# EAGLE board Energy_Meter_v1.1 (EAGLE 9.5.1)
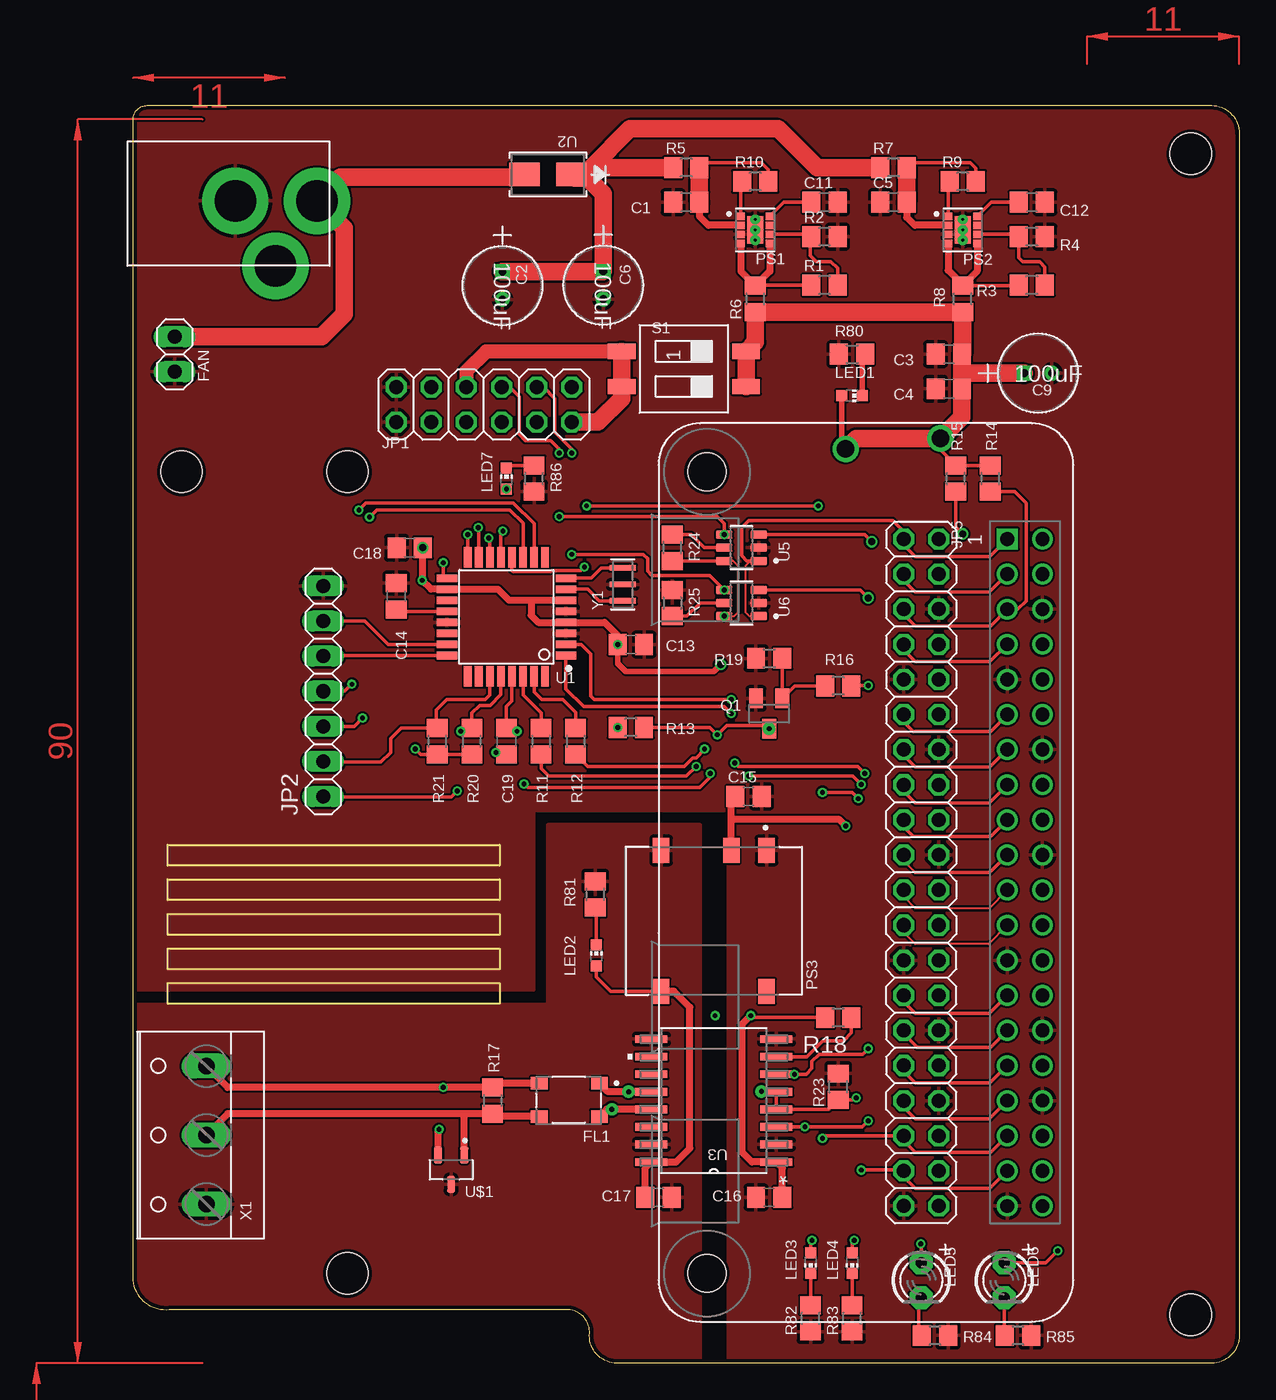
[diagram p0: board, top side]
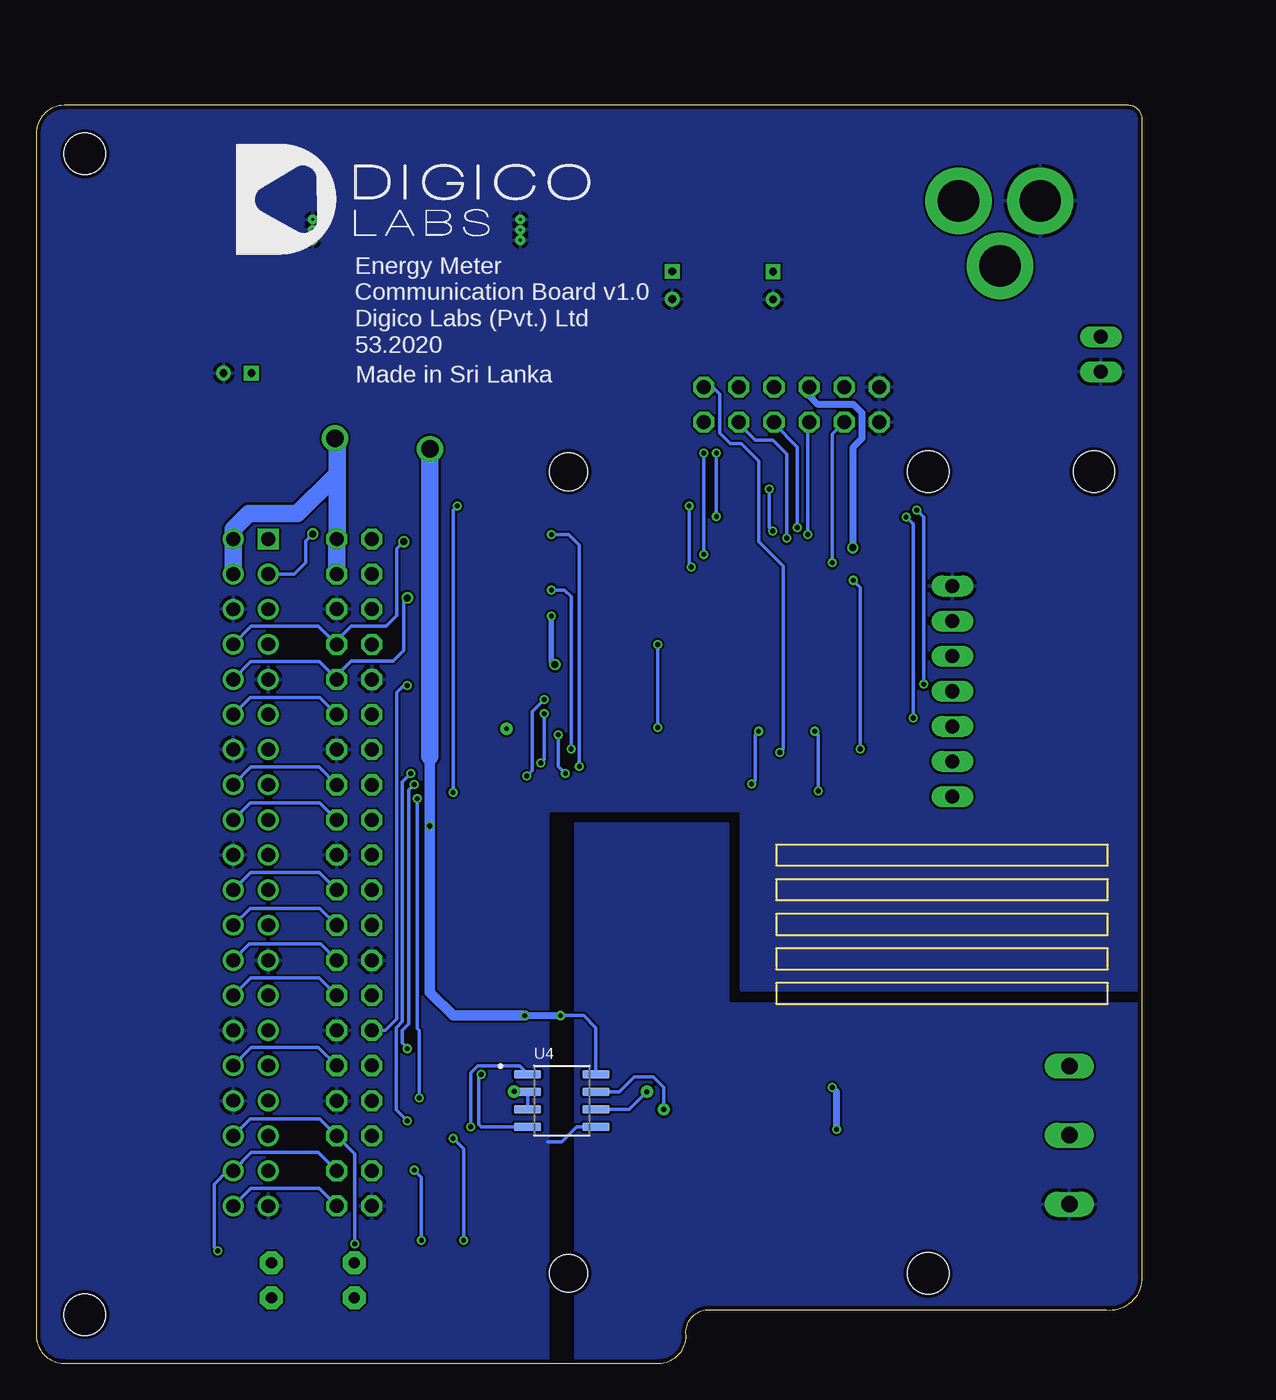
[diagram p1: board, bottom side, seen from below]

Size 80 x 91 mm. Coordinates in mm from the lower left corner, seen from the top.
Outline: 1,91 78,91 arc-90 80,89 80,2 arc-90 78,0 35,0 arc-90 33,2 arc90 31.61,3.85 2.61,3.85 arc-90 0,6 0,90 arc-90 1,91
Copper layers (1*16): Top 0.035mm / dielectric 1.5mm / Bottom 0.035mm
Design rules "Aptinex Fusion_eagle_rule_": minimum track width 6mil, minimum drill 12mil, track to track 6mil, track to pad 6mil, pad to pad 6mil, via to via 6mil, smd to smd 0mil, copper to edge 10mil, drill to drill 10mil, minimum pad ring 10mil, minimum via ring 6mil, stop-mask expansion 2mil, vias tented up to drill 100mil, thermal gap 10mil
Net classes: 1 power: width 0.61 mm, drill 0.711 mm, clearance 0.203 mm
Holes 3 mm at 15.5,64.5 3.5,64.5 76.5,87.5 76.5,3.5 15.5,6.5
Milling: 20 lines

## Footprints (pad centres in the part's own frame; a part is rotated, then mirrored left to right if it is on the bottom)
ADA3708_RPI-ZERO = drill 1 square: 1 -24.13,-1.27 | drill 1: 2 -24.13,1.27; 3 -21.59,-1.27; 4 -21.59,1.27; 5 -19.05,-1.27; 6 -19.05,1.27; 7 -16.51,-1.27; 8 -16.51,1.27; 9 -13.97,-1.27; 10 -13.97,1.27; 11 -11.43,-1.27; 12 -11.43,1.27; 13 -8.89,-1.27; 14 -8.89,1.27; 15 -6.35,-1.27; 16 -6.35,1.27; 17 -3.81,-1.27; 18 -3.81,1.27; 19 -1.27,-1.27; 20 -1.27,1.27; 21 1.27,-1.27; 22 1.27,1.27; 23 3.81,-1.27; 24 3.81,1.27; 25 6.35,-1.27; 26 6.35,1.27; 27 8.89,-1.27; 28 8.89,1.27; 29 11.43,-1.27; 30 11.43,1.27; 31 13.97,-1.27; 32 13.97,1.27; 33 16.51,-1.27; 34 16.51,1.27; 35 19.05,-1.27; 36 19.05,1.27; 37 21.59,-1.27; 38 21.59,1.27; 39 24.13,-1.27; 40 24.13,1.27 | hole 2.75: -29,-23; 29,-23
C0805 = smd 1.3 x 1.5: 1 -0.95,0; 2 0.95,0
NRE-JL_5X11_NIC = drill 0.559 pad 1.067 square: 1 0,0 | drill 0.559 pad 1.067: 2 2.007,0
1X02 = drill 1.016 long: 1 -1.27,0; 2 1.27,0
FIL_DLW43SH510XK2B = smd 1.2 x 0.9: 1 -2.225,-1.25; 2 2.125,-1.25; 3 2.125,1.15; 4 -2.225,1.15
2X06 = drill 1.016 octagon: 1 -6.35,-1.27; 2 -6.35,1.27; 3 -3.81,-1.27; 4 -3.81,1.27; 5 -1.27,-1.27; 6 -1.27,1.27; 7 1.27,-1.27; 8 1.27,1.27; 9 3.81,-1.27; 10 3.81,1.27; 11 6.35,-1.27; 12 6.35,1.27
1X07 = drill 1.016 long: 1 -7.62,0; 2 -5.08,0; 3 -2.54,0; 4 0,0; 5 2.54,0; 6 5.08,0; 7 7.62,0
2X20 = drill 1.016 octagon: 1 -24.13,-1.27; 2 -24.13,1.27; 3 -21.59,-1.27; 4 -21.59,1.27; 5 -19.05,-1.27; 6 -19.05,1.27; 7 -16.51,-1.27; 8 -16.51,1.27; 9 -13.97,-1.27; 10 -13.97,1.27; 11 -11.43,-1.27; 12 -11.43,1.27; 13 -8.89,-1.27; 14 -8.89,1.27; 15 -6.35,-1.27; 16 -6.35,1.27; 17 -3.81,-1.27; 18 -3.81,1.27; 19 -1.27,-1.27; 20 -1.27,1.27; 21 1.27,-1.27; 22 1.27,1.27; 23 3.81,-1.27; 24 3.81,1.27; 25 6.35,-1.27; 26 6.35,1.27; 27 8.89,-1.27; 28 8.89,1.27; 29 11.43,-1.27; 30 11.43,1.27; 31 13.97,-1.27; 32 13.97,1.27; 33 16.51,-1.27; 34 16.51,1.27; 35 19.05,-1.27; 36 19.05,1.27; 37 21.59,-1.27; 38 21.59,1.27; 39 24.13,-1.27; 40 24.13,1.27
CHIP-LED0603 = smd 0.8 x 0.8: A 0,-0.75; C 0,0.75
LED3MM = drill 0.813 pad 1.676 octagon: A -1.27,0; K 1.27,0
RPI3 = drill 1.016 square: P$1 8.37,51.23 | drill 1.016: P$2 8.357,53.772; P$3 10.897,51.232; P$4 10.897,53.772; P$5 13.437,51.232; P$6 13.437,53.772; P$7 15.977,51.232; P$8 15.977,53.772; P$9 18.517,51.232; P$10 18.517,53.772; P$11 21.057,51.232; P$12 21.057,53.772; P$13 23.597,51.232; P$14 23.597,53.772; P$15 26.137,51.232; P$16 26.137,53.772; P$17 28.677,51.232; P$18 28.677,53.772; P$19 31.217,51.232; P$20 31.217,53.772; P$21 33.757,51.232; P$22 33.757,53.772; P$23 36.297,51.232; P$24 36.297,53.772; P$25 38.837,51.232; P$26 38.837,53.772; P$27 41.377,51.232; P$28 41.377,53.772; P$29 43.917,51.232; P$30 43.917,53.772; P$31 46.457,51.232; P$32 46.457,53.772; P$33 48.997,51.232; P$34 48.997,53.772; P$35 51.537,51.232; P$36 51.537,53.772; P$37 54.077,51.232; P$38 54.077,53.772; P$39 56.617,51.232; P$40 56.617,53.772 | hole 2.75: 3.5,3.5; 61.5,3.5; 3.5,52.5; 61.5,52.5
CONV_TPS82140SILR = smd 0.6 x 0.5: 1 -1.05,0.975; 2 -1.05,0.325; 3 -1.05,-0.325; 4 -1.05,-0.975; 5 1.05,-0.975; 6 1.05,-0.325; 7 1.05,0.325; 8 1.05,0.975 | smd 1.2 x 2: 9 0,0 | drill 0.2 pad 0.3: 10 0,0.75; 11 0,0; 12 0,-0.75
CONV_R1SE-0505 = smd 1.8 x 1.2: 1 -5.1,3.81; 2 -5.1,1.27; 4 -5.1,-3.81; 5 5.1,-3.81; 8 5.1,3.81
SOT23 = smd 1 x 1.4: 1 -0.95,-1.1; 2 0.95,-1.1; 3 0,1.1
R0805 = smd 1.3 x 1.5: 1 -0.95,0; 2 0.95,0
SMS-002 = smd 1.092 x 2.007: 1 -1.27,-4.496; 2 1.27,-4.496; 3 1.27,4.496; 4 -1.27,4.496
QFP80P900X900X120-32N = smd 1.5 x 0.55: 1 -4.3,2.8; 2 -4.3,2; 3 -4.3,1.2; 4 -4.3,0.4; 5 -4.3,-0.4; 6 -4.3,-1.2; 7 -4.3,-2; 8 -4.3,-2.8; 17 4.3,-2.8; 18 4.3,-2; 19 4.3,-1.2; 20 4.3,-0.4; 21 4.3,0.4; 22 4.3,1.2; 23 4.3,2; 24 4.3,2.8 | smd 0.55 x 1.5: 9 -2.8,-4.3; 10 -2,-4.3; 11 -1.2,-4.3; 12 -0.4,-4.3; 13 0.4,-4.3; 14 1.2,-4.3; 15 2,-4.3; 16 2.8,-4.3; 25 2.8,4.3; 26 2,4.3; 27 1.2,4.3; 28 0.4,4.3; 29 -0.4,4.3; 30 -1.2,4.3; 31 -2,4.3; 32 -2.8,4.3
CDBA-HF = smd 2.21 x 1.702: 1 -1.702,0; 2 1.702,0
DW16 = smd 2.311 x 0.559: 1 -4.521,4.445; 2 -4.521,3.175; 3 -4.521,1.905; 4 -4.521,0.635; 5 -4.521,-0.635; 6 -4.521,-1.905; 7 -4.521,-3.175; 8 -4.521,-4.445; 9 4.521,-4.445; 10 4.521,-3.175; 11 4.521,-1.905; 12 4.521,-0.635; 13 4.521,0.635; 14 4.521,1.905; 15 4.521,3.175; 16 4.521,4.445
SOIC127P600X175-8N = smd 1.97 x 0.59: 1 -2.475,1.905; 2 -2.475,0.635; 3 -2.475,-0.635; 4 -2.475,-1.905; 5 2.475,-1.905; 6 2.475,-0.635; 7 2.475,0.635; 8 2.475,1.905
SOT95P280X145-6N = smd 1.21 x 0.58: 1 -1.255,0.95; 2 -1.255,0; 3 -1.255,-0.95; 4 1.255,-0.95; 5 1.255,0; 6 1.255,0.95
SOT95P237X112-3N = smd 1.23 x 0.59: 1 -1.06,0.95; 2 -1.06,-0.95; 3 1.06,0
PJ-102A = drill 3 pad 4.8: RING 0.1,-3.39; RING_SW -4.6,-6.29; TIP 0.1,-9.29
W237-103 = drill 1.194 long: 1 -5,-1.29; 2 0,-1.29; 3 5,-1.29
CSTNE16M0V530000R0_MUR = smd 0.406 x 1.905: 1 -1.2,0; 2 0,0; 3 1.2,0

## Placement (x,y rotation side)
A1  ADA3708  [ADA3708_RPI-ZERO]  64.5,35.5 270 top
C1  10uF  [C0805]  40,84 180 top
C2  100uF  [NRE-JL_5X11_NIC]  26.71,78.97 270 top
C3  0.1uF  [C0805]  59,73 180 top
C4  10uF  [C0805]  59,70.5 180 top
C5  10uF  [C0805]  55,84 180 top
C6  100uF  [NRE-JL_5X11_NIC]  34,79 270 top
C9  100uF  [NRE-JL_5X11_NIC]  64.45,71.63 0 top
C11  470pF  [C0805]  50,84 0 top
C12  470pF  [C0805]  65,84 0 top
C13  1uF  [C0805]  36,52 0 top
C14  100nF  [C0805]  19.03,55.49 90 top
C15  1uF  [C0805]  44.5,41 0 top
C16  0.1uF  [C0805]  46,12 180 top
C17  0.1uF  [C0805]  38,12 0 top
C18  0.1uF  [C0805]  20,59 180 top
C19  100nF  [C0805]  27,45 270 top
FAN  [1X02]  3,73 90 top
FL1  DLW43SH510XK2B  [FIL_DLW43SH510XK2B]  31.5,19 180 top
JP1  [2X06]  25.38,69.35 180 top
JP2  [1X07]  13.74,48.62 90 top
JP5  [2X20]  57,35.5 270 top
LED1  [CHIP-LED0603]  52,70 270 top
LED2  [CHIP-LED0603]  33.5,29.5 0 top
LED3  [CHIP-LED0603]  49,7.24 180 top
LED4  [CHIP-LED0603]  52,7.24 180 top
LED5  [LED3MM]  57,6 270 top
LED6  [LED3MM]  63,6 270 top
LED7  [CHIP-LED0603]  27,64 0 top
PCB1  RPI3  [RPI3]  105,68.5 270 top  (outside the outline)
PS1  TPS82140SILR  [CONV_TPS82140SILR]  45,82 0 top
PS2  TPS82140SILR  [CONV_TPS82140SILR]  60,82 0 top
PS3  R1SE-0505  [CONV_R1SE-0505]  42,32 270 top
Q1  2N7002  [SOT23]  46,47 180 top
R1  525k  [R0805]  50,78 180 top
R2  100k  [R0805]  50,81.5 180 top
R3  525k  [R0805]  65,78 180 top
R4  100k  [R0805]  65,81.5 180 top
R5  0  [R0805]  40,86.5 180 top
R6  0Ohm  [R0805]  45,77 90 top
R7  0  [R0805]  55,86.5 180 top
R8  0Ohm  [R0805]  60,77 90 top
R9  [R0805]  60,85.5 180 top
R10  [R0805]  45,85.5 180 top
R11  1k  [R0805]  29.5,45 270 top
R12  1k  [R0805]  32,45 270 top
R13  1k  [R0805]  36,46 180 top
R14  4.7k  [R0805]  62,64 90 top
R15  4.7k  [R0805]  59.5,64 90 top
R16  470  [R0805]  51,49 180 top
R17  120  [R0805]  26,19 270 top
R18  [R0805]  51,25 180 top
R19  10k  [R0805]  46,51 0 top
R20  4.7k  [R0805]  24.5,45 90 top
R21  4.7k  [R0805]  22,45 90 top
R23  10k  [R0805]  51,20 90 top
R24  10k  [R0805]  39,59 90 top
R25  10k  [R0805]  39,55 270 top
R80  330  [R0805]  52,73 0 top
R81  [R0805]  33.42,33.91 270 top
R82  330  [R0805]  49,3.24 90 top
R83  330  [R0805]  52,3.24 90 top
R84  330  [R0805]  58,2 180 top
R85  330  [R0805]  64,2 180 top
R86  330  [R0805]  29,64 90 top
S1  SWS002  [SMS-002]  39.84,71.94 270 top
U1  ATMEGA328P-AU  [QFP80P900X900X120-32N]  27,54 180 top
U2  [CDBA-HF]  30,86 180 top
U3  ISO1176DWR  [DW16]  42,19 180 top
U4  MAX485ESA+T  [SOIC127P600X175-8N]  42,19 0 bottom
U5  SN74LVC1T45DBVT  [SOT95P280X145-6N]  44,59 180 top
U6  SN74LVC1T45DBVT  [SOT95P280X145-6N]  44,55 180 top
U$1  ESDCAN01-2BLY  [SOT95P237X112-3N]  23,14 270 top
U$2  2.1MMJACKTHM  [PJ-102A]  4,84 90 top
X1  [W237-103]  4,16.5 90 top
Y1  16 MHz  [CSTNE16M0V530000R0_MUR]  35.41,56.35 90 top

## Library data of the parts
A1 = ADA3708; AVAILABILITY: Unavailable; DESCRIPTION: Raspberry Pi Zero WH (Zero W with Headers); MF: Raspberry Pi; MP: ADA3708; PACKAGE: None; PRICE: None
C1 C3-C5 C11-C19 = rcl; SPICEPREFIX: C
C2 C6 C9 = NREJL101M25V5X11F; BUILT_BY: EMA_UL_Team; MANUFACTURER_PART_NUMBER: NRE-JL101M25V5X11F; SOURCELIBRARY: NIC_2017-02-28_3; VENDOR: NIC Components Corp.
FAN JP1 JP2 JP5 = pinhead
FL1 = PE-1812ACC510STS; AVAILABILITY: Warning; DESCRIPTION: Common Mode Chokes Dual 51uH 1MHz 230mA 1Ohm DCR SMD Automotive Bag; MF: Murata; MP: DLW43SH510XK2B; PACKAGE: None; PRICE: None
LED1-LED7 U$2 = adafruit
PCB1 = e14_Rpi3_RevA
PS1 PS2 = TPS82140SILR; AVAILABILITY: Warning; DESCRIPTION: 17V Input 2A Synchronous Step-Down Converter MicroSiP Module With Integrated Inductor 8-uSiP -40 to 125; MF: Texas Instruments; MP: TPS82140SILR; PACKAGE: USIP-8 Texas Instruments; PRICE: None; PURCHASE-URL: https://pricing.snapeda.com/search/part/TPS82140SILR/?ref=eda
PS3 = R1SE-0505; AVAILABILITY: Unavailable; DESCRIPTION: 1W DC/DC-Converter 'ECONOLINE' SMD 1kV unreg; MF: Recom Power; MP: R1SE-0505; PACKAGE: SMD-8 Recom Power; PRICE: None
Q1 = 2N7002; AVAILABILITY: Good; DESCRIPTION: N-Channel 60V 115mA (Tc) 225mW (Ta) Surface Mount SOT-23-3 (TO-236); MF: STMicroelectronics; MP: 2N7002; PACKAGE: SOT-23-3 Vishay; PRICE: None; PURCHASE-URL: https://pricing.snapeda.com/search/part/2N7002/?ref=eda
R1-R21 R23-R25 R80-R86 = rcl; SPICEPREFIX: R
S1 = smd-special
U1 = ATMEGA328P-AU; AVAILABILITY: Good; DESCRIPTION: AVR AVR® ATmega Microcontroller IC 8-Bit 20MHz 32KB (16K x 16) FLASH 32-TQFP (7x7); MF: Microchip Technology; MP: ATMEGA328P-AU; PACKAGE: TQFP-32 Microchip Technology; PRICE: None; PURCHASE-URL: https://pricing.snapeda.com/search/part/ATMEGA328P-AU/?ref=eda
U2 = CDBA240HF; BUILT_BY: EMA_UL_Team; MANUFACTURER_PART_NUMBER: CDBA240-HF; SOURCELIBRARY: ComchipTechnology_2015-04-20; VENDOR: Comchip
U3 = ISO1176DWR; DATASHEET_URL: http://www.ti.com/lit/gpn/ISO1176; DESCRIPTION: Isolated PROFIBUS RS-485 Transceiver; FAMILY_NAME: ISOLATOR; GENERIC_PART_NUMBER: ISO1176; INDUSTRY_STD_PKG_TYPE: SOIC; MANUFACTURER: Texas Instruments; MANUFACTURER_PART_NUMBER: ISO1176DWR; PACKAGE_DESIGNATOR: DW; PIN_COUNT: 16; VENDOR: Texas Instruments
U4 = MAX485ESA_T; AVAILABILITY: Warning; DESCRIPTION: 1/1 Transceiver Half RS422, RS485 8-SOIC; MF: Maxim Integrated; MP: MAX485ESA; PACKAGE: SOIC-8 Maxim Integrated; PRICE: None; PURCHASE-URL: https://pricing.snapeda.com/search/part/MAX485ESA/?ref=eda
U5 U6 = SN74LVC1T45DBVT; AVAILABILITY: Good; DESCRIPTION: Single-Bit Dual-Supply Bus Transceiver with Configurable Voltage-Level Shifting and 3-State Outputs 6-SOT-23 -40 to 85; MF: Texas Instruments; MP: SN74LVC1T45DBVT; PACKAGE: SOT-23-6 Texas Instruments; PRICE: None; PURCHASE-URL: https://pricing.snapeda.com/search/part/SN74LVC1T45DBVT/?ref=eda
U$1 = ESDCAN01-2BLY
X1 = con-wago-500; MPN: 237-103; OC_FARNELL: unknown; OC_NEWARK: 18M7116
Y1 = CSTNE16M0V530000R0; BUILT_BY: EMA_Cory; COPYRIGHT: Copyright (C) 2018 Accelerated Designs. All rights reserved; MANUFACTURER_PART_NUMBER: CSTNE16M0V530000R0; SOURCELIBRARY: Murata_2020-01-23; VENDOR: Murata

## Nets
3.3V: A1.1 JP5.1 U5.1 U6.1
3.3V2: A1.17 JP5.17
5V_EXTERNAL: PCB1.P$2 PCB1.P$4
5V_FTDI: C13.1 C18.1 JP1.2 JP1.7 R13.2 R20.1 R21.1 R24.1 S1.1 S1.2 U1.4 U1.6 U1.18 U5.6 U6.6
5V_ISO: C17.1 LED2.A PS3.5 U3.16
5V_VCC: A1.2 A1.4 C3.1 C4.1 C9.1 C15.1 C16.1 JP5.2 JP5.4 LED1.A PS3.2 R6.1 R8.1 R14.2 R15.2 R18.2 S1.3 S1.4 U3.1 U4.8
12_IN: FAN.2 U2.2 U$2.TIP
12V: C2.1 C6.1 R5.2 R7.2 U2.1
A: FL1.2 R17.1 U$1.2 X1.3
A_0: JP2.6 U1.23
A_1: JP2.5 U1.24
AR_MISO: JP1.8 U1.16
AR_MOSI: JP1.6 U1.15
AR_SCL: JP2.1 R20.2 U1.28
AR_SCLK: JP1.10 U1.17
AR_SDA: JP2.2 R21.2 U1.27
AR_SS: JP1.4 U1.14
B: FL1.3 R17.2 U$1.1 X1.2
CTS: JP1.9
D_6: JP2.4 U1.10
D_7: JP2.3 U1.11
DTR: C19.2 JP1.1
EN1: C1.1 PS1.2 R5.1 R10.1
EN2: C5.1 PS2.2 R7.1 R9.1
FB1: PS1.6 R1.1 R2.2
FB2: PS2.6 R3.1 R4.2
GND: A1.6 A1.9 A1.14 A1.20 A1.25 A1.30 A1.34 A1.39 C1.2 C2.2 C3.2 C4.2 C5.2 C6.2 C9.2 C11.2 C12.2 C13.2 C14.2 C15.2 C16.2 C18.2 FAN.1 JP1.11 JP1.12 JP2.7 JP5.6 JP5.9 JP5.14 JP5.20 JP5.25 JP5.30 JP5.34 JP5.39 PS1.3 PS1.9 PS1.10 PS1.11 PS1.12 PS2.3 PS2.9 PS2.10 PS2.11 PS2.12 PS3.1 Q1.2 R2.1 R4.1 R19.1 R23.2 R25.1 R80.1 R82.1 R83.1 R84.1 R85.1 R86.1 U1.3 U1.5 U1.21 U3.2 U3.8 U4.5 U5.2 U6.2 U$2.RING Y1.2
GND_ISO: C17.2 PS3.4 R81.1 U3.9 U3.15 U$1.3 X1.1
GPIO_5: A1.29 JP5.29 R16.1
LED3: A1.35 JP5.35 LED3.A
LED4: A1.37 JP5.37 LED4.A
LED5: A1.36 JP5.36 LED5.A
LED6: A1.38 JP5.38 LED6.A
LED7: LED7.A U1.13
MAX_A: FL1.1 U3.12 U4.6
MAX_B: FL1.4 U3.13 U4.7
MISO: A1.21 JP5.21
MOSI: A1.19 JP5.19
N$1: R24.2 U5.5
N$2: R18.1 U3.7
N$3: PS2.1 R9.2
N$6: A1.7 JP5.7
N$7: C14.1 U1.20
N$8: PS1.1 R10.2
N$9: A1.11 JP5.11
N$10: A1.13 JP5.13
N$11: R25.2 U6.5
N$12: A1.15 JP5.15
N$13: A1.27 JP5.27
N$14: A1.31 JP5.31
N$15: U1.7 Y1.1
N$16: A1.33 JP5.33
N$17: U1.8 Y1.3
N$18: A1.12 JP5.12
N$19: A1.16 JP5.16
N$22: A1.18 JP5.18
N$23: A1.22 JP5.22
N$24: A1.24 JP5.24
N$25: A1.26 JP5.26
N$26: A1.28 JP5.28
N$27: A1.32 JP5.32
N$28: R11.1 U1.30
N$29: R12.1 U1.31
N$30: LED2.C R81.2
N$31: LED3.C R82.2
N$32: LED4.C R83.2
N$33: LED5.K R84.2
N$34: LED6.K R85.2
N$35: LED1.C R80.2
N$36: A1.40 JP5.40
N$37: Q1.1 R16.2 R19.2
N$46: LED7.C R86.2
PUSH_BTN_3: PCB1.P$33
RESET: C19.1 Q1.3 R13.1 U1.29
RS_ENABLE: R23.1 U1.12 U3.4 U3.5 U4.2 U4.3
RX_AR: JP1.5 R11.2 U5.4
RX_PI: A1.10 JP5.10 U6.3
RXD: U1.1 U3.3 U4.1
SCL: A1.5 JP5.5 R14.1
SCLK: A1.23 JP5.23
SDA: A1.3 JP5.3 R15.1
SS1: C11.1 PS1.8
SS2: C12.1 PS2.8
TX_AR: JP1.3 R12.2 U6.4
TX_PI: A1.8 JP5.8 U5.3
TXD: U1.2 U3.6 U4.4
VOUT1: PS1.4 PS1.5 R1.2 R6.2
VOUT2: PS2.4 PS2.5 R3.2 R8.2

## Tracks (layer width: path | path; a pad name or v marks a point on that pad's centre or on a via)
3.3V
  Top 0.152: 45.24,58.06 44.68,58.06 44.27,57.66 44.27,54.36 44.58,54.05 U6.1
  Top 0.254: A1.1 61.97,58.37 56.57,58.37 55.73,59.21 JP5.1 55.73,60.17 54.94,60.96 44.53,60.96 44.02,60.45 44.02,58.42 44.39,58.05 U5.1 45.24,58.06
3.3V2
  Top 0.254: A1.17 62.02,38.1 56.41,38.1 55.73,38.78 JP5.17
5V_EXTERNAL  (1 unrouted)
5V_FTDI  (via drill 0.35, 0.51)
  Top 0.152: 42.76,58.06 43.36,58.06 43.77,57.66 43.77,54.36 43.46,54.05 U6.6
  Top 0.254: 42.76,58.06 U5.6 R24.1 | R20.1 R21.1 20.8,44.05 v20.4,44.45
  Top 0.381: C13.1 35.05,50.63 35.64,50.04 41.99,50.04 v42.5,50.55
  Top 0.508: 28.78,55.2 27.17,55.2 26.37,56 U1.18 21.55,56 v20.91,56.64 20.91,58.96 C18.1 | 28.78,55.2 U1.6 | 28.78,55.2 28.78,54.1 29.29,53.59 U1.4 34.11,53.6 35.05,52.66 C13.1
  Top 1.016: S1.1 25.53,73.2 24.11,71.78 JP1.7
  Top 1.27: JP1.2 33.62,68.08 35.34,69.81 S1.2 S1.1
  Bottom 0.254: R13.2 C13.1 | v20.4,44.45 20.4,56.13 v20.91,56.64
  Bottom 0.381: v42.5,50.55 42.75,50.8 U6.6
  Bottom 0.508: C18.1 20.91,59.04 20.91,66.29 20.28,66.92 20.28,68.75 20.89,69.37 23.47,69.37 24.11,70 JP1.7
  other vias: 20.95,59 42.75,54.05 35.05,46 35.05,52
5V_ISO
  Top 0.254: PS3.5 34.54,26.9 33.5,27.94 LED2.A
  Top 0.508: C17.1 37.05,14.13 U3.16 39.27,14.55 40.26,15.54 40.26,25.76 39.12,26.9 PS3.5
5V_VCC  (via drill 0.35, 1.27)
  Top 0.254: R14.2 R15.2 58.4,66.05 v58.4,66.9 | R18.2 44.83,25 v44.68,25.15
  Top 0.406: v51.54,66.14 51.25,66.43 LED1.A
  Top 0.508: C16.1 46.95,14.13 U3.1 44.76,14.55 44.07,15.24 44.07,24.54 v44.68,25.15 | PS3.2 43.27,39.37 | 43.27,39.37 43.27,40.72 C15.1 | 43.27,39.37 50.47,39.37 50.78,39.37 51.03,39.37 v51.54,38.86
  Top 1.27: 59.95,72 C3.1 60,73.05 R8.1 R6.1 45,73.87 S1.4 S1.3 | 59.95,72 C4.1 59.95,68.46 v58.4,66.9 52.3,66.9 v51.54,66.14 | C9.1 60.32,71.63 59.95,72
  Bottom 0.254: U4.8 39.52,24.26 40.41,25.15 v42.09,25.15
  Bottom 0.508: v44.68,25.15 v42.09,25.15
  Bottom 0.762: 51.54,43.89 v51.54,38.86 51.54,26.82 49.86,25.15 v44.68,25.15
  Bottom 1.27: v58.4,66.9 58.24,66.75 58.24,64.16 | 58.24,64.16 58.24,59.66 JP5.2 JP5.4 | 58.24,64.16 58.43,64.16 61.11,61.47 64.65,61.47 65.77,60.35 A1.2 A1.4 | v51.54,66.14 51.54,43.89
12_IN
  Top 1.27: U2.2 28.61,86 28.81,85.8 14.99,85.8 U$2.TIP 15.27,82.12 15.27,75.89 13.64,74.27 FAN.2
12V
  Top 1.27: 33.12,86.5 32.87,86.25 31.96,86.25 U2.1 31.96,85.75 32.87,85.75 34,84.62 C6.1 33.97,78.97 C2.1 | 33.12,86.5 R5.2 | 33.12,86.5 35.93,89.31 46.66,89.31 49.47,86.5 R7.2
A  (via drill 0.35)
  Top 0.508: FL1.2 26.3,20.25 R17.1 v22.43,19.95 6.84,19.95 X1.3 | U$1.2 22.05,16.84 v22.12,16.92
  Bottom 0.508: v22.12,16.92 22.12,19.64 v22.43,19.95
A_0
  Top 0.254: U1.23 18.44,52 17.55,52.88 17.35,53.09 16.74,53.7 JP2.6
A_1
  Top 0.254: JP2.5 13.79,51.2 U1.24
AR_MISO  (via drill 0.35)
  Top 0.254: U1.16 v24.2,59.94 v24.21,59.94
  Bottom 0.254: v24.21,59.94 24.21,67.98 JP1.8
AR_MOSI  (via drill 0.35)
  Top 0.254: U1.15 25,60.42 v24.97,60.45
  Bottom 0.254: v24.97,60.45 24.97,66.29 26.65,67.97 JP1.6
AR_SCL  (via drill 0.35)
  Top 0.254: U1.28 26.6,48.37 25.83,47.6 25.07,47.6 24.5,47.03 R20.2 23.93,45.95 v23.7,45.72 | v23.45,41.4 23.01,40.96 13.78,40.96 JP2.1
  Bottom 0.254: v23.7,45.72 23.45,45.47 v23.45,41.4
AR_SCLK  (via drill 0.35)
  Top 0.254: U1.17 22.43,57.07 v22.43,57.91
  Bottom 0.254: v22.43,57.91 22.43,67.22 JP1.10
AR_SDA
  Top 0.254: 21.92,45.95 R21.2 | U1.27 25.8,48.33 25.48,48.01 22.68,48.01 21.92,47.24 21.92,45.95 | 21.92,45.95 21.9,45.97 19.38,45.97 18.62,45.21 18.62,44.2 17.93,43.5 13.78,43.5 JP2.2
AR_SS  (via drill 0.35)
  Top 0.254: U1.14 25.8,59.62 v25.73,59.69
  Bottom 0.254: v25.73,59.69 25.73,65.79 26.75,66.8 28.02,66.8 29.19,67.97 JP1.4
B
  Top 0.508: FL1.3 26.2,17.85 R17.2 24.11,18.05 | 24.11,18.05 6.84,18.05 X1.2 | U$1.1 23.95,17.89 24.11,18.05
D_6  (via drill 0.35)
  Top 0.254: U1.10 29,60.74 27.51,62.23 16.84,62.23 v16.33,61.72 | JP2.4 15.32,48.62 v15.83,49.12
  Bottom 0.254: v15.83,49.12 15.83,61.21 v16.33,61.72
D_7  (via drill 0.35)
  Top 0.254: U1.11 28.2,60.78 27.26,61.72 17.6,61.72 v17.1,61.21 | v16.59,46.69 15.98,46.08 JP2.3
  Bottom 0.254: v17.1,61.21 16.59,60.71 v16.59,46.69
DTR  (via drill 0.35)
  Top 0.254: C19.2 26.39,44.05 v26.24,44.2
  Bottom 0.254: v26.24,44.2 25.99,44.45 25.99,57.66 27.76,59.44 27.76,65.28 29.03,66.55 29.8,66.55 30.56,67.31 30.56,70.1 31.08,70.62 JP1.1
EN1
  Top 0.254: R5.1 41.32,86.87 45.44,86.87 45.95,86.36 R10.1
  Top 0.508: PS1.2 41.6,82.33 40.95,82.98 C1.1
  Top 1.27: C1.1 R5.1
EN2
  Top 0.254: R7.1 56.32,86.87 60.53,86.87 60.95,86.45 R9.1
  Top 0.508: PS2.2 56.54,82.33 55.95,82.91 C5.1
  Top 1.27: R7.1 C5.1
FB1
  Top 0.254: PS1.6 48.88,81.67 48.98,81.57 | 48.98,81.57 R2.2 | R1.1 50.95,79.23 50.47,79.7 49.41,79.7 48.98,80.13 48.98,81.57
FB2
  Top 0.254: PS2.6 63.88,81.67 R4.2 64.05,80 64.34,79.7 65.56,79.7 65.95,79.31 R3.1
GND
  Bottom 0.254: U4.5 40.91,17.09 42,16 43,16
  pour Top: -1,27 29,27 29,40 43,40 43,-1 81,-1 81,93 -1,93
  pour Bottom: -2,27 29,27 29,40 43,40 43,-2 82,-2 82,94 -2,94
GND_ISO
  pour Top: -1,26 30,26 30,39 41,39 41,-1.13 -1,-1.13
  pour Bottom: -2,26 30,26 30,39 41,39 41,-2 -2,-2
GPIO_5  (via drill 0.35)
  Top 0.254: A1.29 62.02,22.86 56.72,22.86 55.73,23.85 JP5.29 | v53.16,49.02 51.97,49.02 R16.1
  Bottom 0.254: JP5.29 54.75,24.07 53.93,24.89 53.93,48.51 53.42,49.02 v53.16,49.02
LED3  (via drill 0.35)
  Top 0.254: A1.35 62.02,15.24 56.57,15.24 55.73,16.08 JP5.35 50.06,16.45 v49.86,16.26 | LED3.A 49,8.79 v49.1,8.89
  Bottom 0.254: v49.1,8.89 49.1,15.49 v49.86,16.26
LED4  (via drill 0.35)
  Top 0.254: A1.37 61.97,12.65 56.57,12.65 55.73,13.49 JP5.37 55.67,13.97 v52.66,13.97 | LED4.A 52,8.74 v52.15,8.89
  Bottom 0.254: v52.15,8.89 52.15,13.46 v52.66,13.97
LED5  (via drill 0.35)
  Top 0.254: LED5.A 57,8.61 v56.97,8.64
  Bottom 0.254: A1.36 64.54,17.68 59.5,17.68 JP5.36 56.97,15.15 v56.97,8.64
LED6  (via drill 0.35)
  Top 0.254: LED6.A 66.02,7.27 v66.88,8.13
  Bottom 0.254: v66.88,8.13 67.13,8.38 67.13,12.95 66.18,13.91 A1.38 64.44,15.24 59.6,15.24 JP5.38
LED7  (via drill 0.35)
  Top 0.254: U1.13 26.6,60.05 v26.75,60.2
  Bottom 0.254: v26.75,60.2 27,60.45 LED7.A
  other vias: 27,63.25
MAX_A  (via drill 0.35 pad 0.9)
  Top 0.508: U3.12 v35.84,19.64 34.34,19.64 FL1.1
  Bottom 0.254: U4.6 37.11,18.36 v35.84,19.64
MAX_B  (via drill 0.35 pad 0.9)
  Top 0.508: U3.13 v34.62,18.36 34.24,18.36 FL1.4
  Bottom 0.254: U4.7 37.85,19.64 36.76,20.73 35.38,20.73 34.62,19.96 v34.62,18.36
MISO
  Top 0.152: A1.21 61.92,32.92 56.57,32.92 55.73,33.76 JP5.21
MOSI
  Top 0.152: 56.57,35.51 55.73,36.35 JP5.19
  Top 0.254: A1.19 61.97,35.51 56.57,35.51
N$1
  Top 0.254: U5.5 41.31,59 40.36,59.95 R24.2
N$2
  Top 0.254: R18.1 51.95,23.88 51.39,23.32 49.86,23.32 48.72,22.18 U3.7
N$3
  Top 0.254: PS2.1 58.95,85.4 R9.2
N$6
  Top 0.254: A1.7 61.97,50.75 56.57,50.75 55.73,51.59 JP5.7
N$7
  Top 0.254: C14.1 19.17,54.4 U1.20
N$8
  Top 0.254: R10.2 43.95,85.4 PS1.1
N$9
  Top 0.254: A1.11 62.02,45.72 56.41,45.72 55.73,46.41 JP5.11
N$10
  Top 0.254: A1.13 61.97,43.13 56.57,43.13 55.73,43.97 JP5.13
N$11
  Top 0.254: U6.5 41.01,55 40.06,54.05 R25.2
N$12
  Top 0.254: A1.15 61.92,40.54 56.57,40.54 55.73,41.38 JP5.15
N$13
  Top 0.254: A1.27 61.92,25.3 56.57,25.3 55.73,26.14 JP5.27
N$14
  Top 0.254: A1.31 61.97,20.27 56.57,20.27 55.73,21.11 JP5.31
N$15
  Top 0.254: Y1.1 33.73,55.15 32.88,56 U1.7
N$16
  Top 0.254: A1.33 61.92,17.68 56.57,17.68 55.73,18.52 JP5.33
N$17
  Top 0.254: U1.8 33.13,56.8 33.88,57.55 Y1.3
N$18
  Bottom 0.254: A1.12 64.54,48.16 59.5,48.16 JP5.12
N$19
  Bottom 0.254: A1.16 64.49,43.13 59.55,43.13 JP5.16
N$22
  Bottom 0.254: A1.18 64.54,40.54 59.5,40.54 JP5.18
N$23
  Bottom 0.254: A1.22 64.49,35.51 59.55,35.51 JP5.22
N$24
  Bottom 0.254: A1.24 64.54,32.92 59.5,32.92 JP5.24
N$25
  Bottom 0.254: A1.26 64.59,30.33 59.45,30.33 JP5.26
N$26
  Bottom 0.254: A1.28 64.49,27.89 59.55,27.89 JP5.28
N$27
  Bottom 0.254: A1.32 64.44,22.86 59.6,22.86 JP5.32
N$28
  Top 0.254: R11.1 29.5,47.03 28.2,48.33 U1.30
N$29
  Top 0.254: U1.31 29,48.55 29.54,48.01 31.07,48.01 32,47.07 R12.1
N$30
  Top 0.254: LED2.C 33.5,32.88 R81.2
N$31
  Top 0.254: LED3.C R82.2
N$32
  Top 0.254: R83.2 LED4.C
N$33
  Top 0.254: R84.2 56.8,2.25 56.8,4.53 LED5.K
N$34
  Top 0.254: R85.2 63,2.05 LED6.K
N$35
  Top 0.406: LED1.C 52.75,72.8 R80.2
N$36
  Bottom 0.254: A1.40 64.49,12.65 59.55,12.65 JP5.40
N$37
  Top 0.254: R16.2 47.85,49 Q1.1 R19.2
N$46
  Top 0.254: LED7.C 27.2,64.95 R86.2
RESET  (via drill 0.35, 0.35 pad 0.9)
  Top 0.254: U1.29 27.4,47.9 27,47.5 C19.1 27.53,45.95 v27.76,45.72 | v28.27,41.91 28.53,41.66 40.97,41.66 41.73,42.42 v41.73,42.67 | Q1.3 45.75,46.15 42.93,46.15 v42.24,45.47 41.71,46 R13.1
  Bottom 0.254: v27.76,45.72 28.02,45.47 28.02,42.16 v28.27,41.91 | v41.73,42.67 42.24,43.18 v42.24,45.47
  other vias: 46,45.9
RS_ENABLE  (via drill 0.35, 0.35 pad 0.9)
  Top 0.254: U3.5 U3.4 50.31,18.36 R23.1 52.15,19.05 v52.3,19.2 | U1.12 27.4,57.36 27.49,57.27 30.19,57.27 30.27,57.35 32.39,57.35 v32.64,57.61 | v52.45,40.84 52,41.3 v49.86,41.3 | v49.56,62.03 v32.79,62.03
  Top 0.508: v45.44,19.66 46.5,19.66 U3.5
  Bottom 0.254: U4.2 U4.3 | v52.3,19.2 52.3,24.08 52.45,24.23 v52.45,40.84 | v49.86,41.3 49.86,61.72 v49.56,62.03 | v32.79,62.03 32.79,57.76 v32.64,57.61
  Bottom 0.508: U4.2 44.5,19.66 v45.44,19.66
RX_AR  (via drill 0.35)
  Top 0.254: R11.2 29.5,43.03 30.07,42.47 40.01,42.47 v40.72,43.18 | JP1.5 27.25,70.62 27.92,69.95 27.92,67.21 28.37,66.75 30.2,66.75 30.81,66.14 v30.81,65.84 | v30.81,61.27 42.24,61.27 42.75,60.76 U5.4
  Bottom 0.254: v40.72,43.18 40.72,59.18 41.49,59.95 U5.4 | v30.81,65.84 v30.81,61.27
  other vias: 42.75,59.95
RX_PI  (via drill 0.51)
  Top 0.254: U6.3 52.59,55.95 v53.16,55.37
  Bottom 0.254: A1.10 64.49,50.75 59.55,50.75 58.29,49.49 | 58.29,49.49 JP5.10 | v53.16,55.37 53.42,55.12 53.42,51.56 54.18,50.8 57.23,50.8 58.29,49.74 58.29,49.49
RXD  (via drill 0.35)
  Top 0.254: U3.3 v48.59,17.09 52.73,17.09 v53.16,17.53 | v43.26,46.99 42.75,47.5 32.59,47.5 31.3,48.79 U1.1 | v52.91,42.67 52.4,43.18 43.77,43.18 v43.51,43.43
  Bottom 0.254: v43.51,43.43 43.26,43.69 v43.26,46.99 | v48.59,17.09 48.59,21 48.08,21.51 45.04,21.51 44.48,20.95 U4.1 | v53.16,17.53 53.98,18.34 53.98,24.27 53.52,24.72 53.52,42.06 v52.91,42.67
SCL
  Top 0.254: JP5.5 55.73,54.18 56.57,53.34 62.02,53.34 A1.5 63.99,54.55 64.59,55.15 64.59,62.23 63.77,63.05 R14.1
SCLK
  Top 0.152: A1.23 61.87,30.33 56.57,30.33 55.73,31.16 JP5.23
SDA  (via drill 0.51)
  Top 0.254: A1.3 61.92,55.78 56.57,55.78 55.73,56.62 JP5.3 | R15.1 59.5,60.5 v60,60
  Bottom 0.254: v60,60 60.53,59.47 60.53,57.91 61.35,57.09 A1.3
SS1
  Top 0.254: PS1.8 47.08,84 C11.1
SS2
  Top 0.254: PS2.8 62.08,84 C12.1
TX_AR  (via drill 0.35)
  Top 0.254: R12.2 32.87,43.18 39.86,43.18 40.47,43.79 40.72,43.79 41.33,44.39 v41.33,44.45 | JP1.3 29.68,70.62 30.51,69.8 30.51,67.36 31.73,66.14 v31.73,65.84 | U6.4 41.7,57 37.52,57 37.21,57.3 37.21,58.22 36.91,58.52 v31.73,58.52
  Bottom 0.254: v41.33,44.45 41.33,55.47 41.8,55.95 U6.4 | v31.73,65.84 v31.73,58.52
  other vias: 42.75,55.95
TX_PI  (via drill 0.51)
  Top 0.254: v53.42,59.44 52.9,59.95 U5.3
  Bottom 0.254: A1.8 64.44,53.34 59.6,53.34 JP5.8 58.27,52.3 57.23,53.34 54.69,53.34 53.93,54.1 53.93,58.93 v53.42,59.44
TXD  (via drill 0.35)
  Top 0.254: U1.2 32.41,52 33.1,51.31 33.1,48.26 33.35,48.01 v43.26,48.01 | v44.53,42.48 52.04,42.48 v52.66,41.87 | v53.16,22.76 52.76,22.35 49.61,22.35 49.1,21.84 49.1,21.34 48.67,20.91 v47.83,20.91 U3.6
  Bottom 0.254: v43.26,48.01 44.12,47.15 44.12,42.89 v44.53,42.48 | v52.66,41.87 53.06,41.46 53.06,24.54 53.52,24.08 53.52,23.16 53.16,22.81 v53.16,22.76 | U4.4 47.81,17.09 47.98,17.27 47.98,20.75 v47.83,20.91
VOUT1
  Top 0.254: R6.2 45.05,78 R1.2
  Top 0.508: PS1.4 43.95,79 R6.2 | PS1.5 46.05,79 45.05,78
VOUT2
  Top 0.254: R8.2 60.07,77.95 64,77.95 R3.2
  Top 0.508: PS2.4 58.95,79.07 60.07,77.95 | PS2.5 61.05,79 R8.2
(copper drawn outside any net)
  shapes: Top area x5

## Text on the board
bPlace: Energy Meter / Communication Board v1.0 / Digico Labs (Pvt.) Ltd / 53.2020
bNames: Made in Sri Lanka